# EAGLE board LinCorrector2.1 (EAGLE 7.4.0)
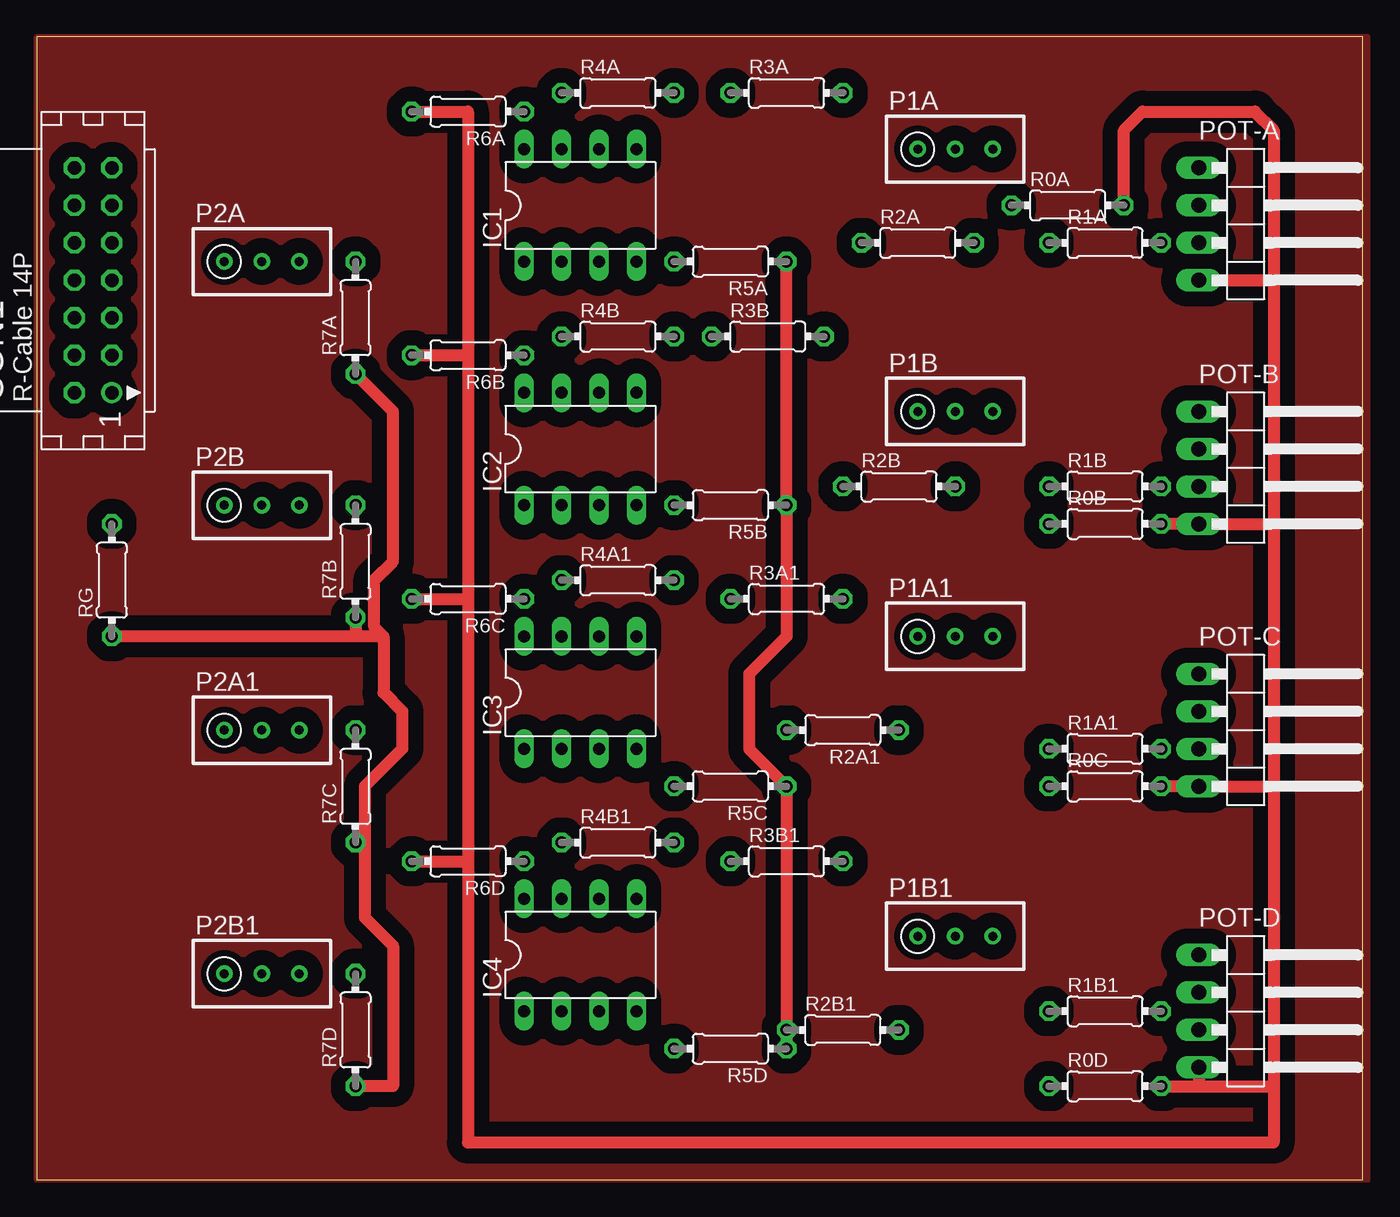
[diagram p0: board, top side]
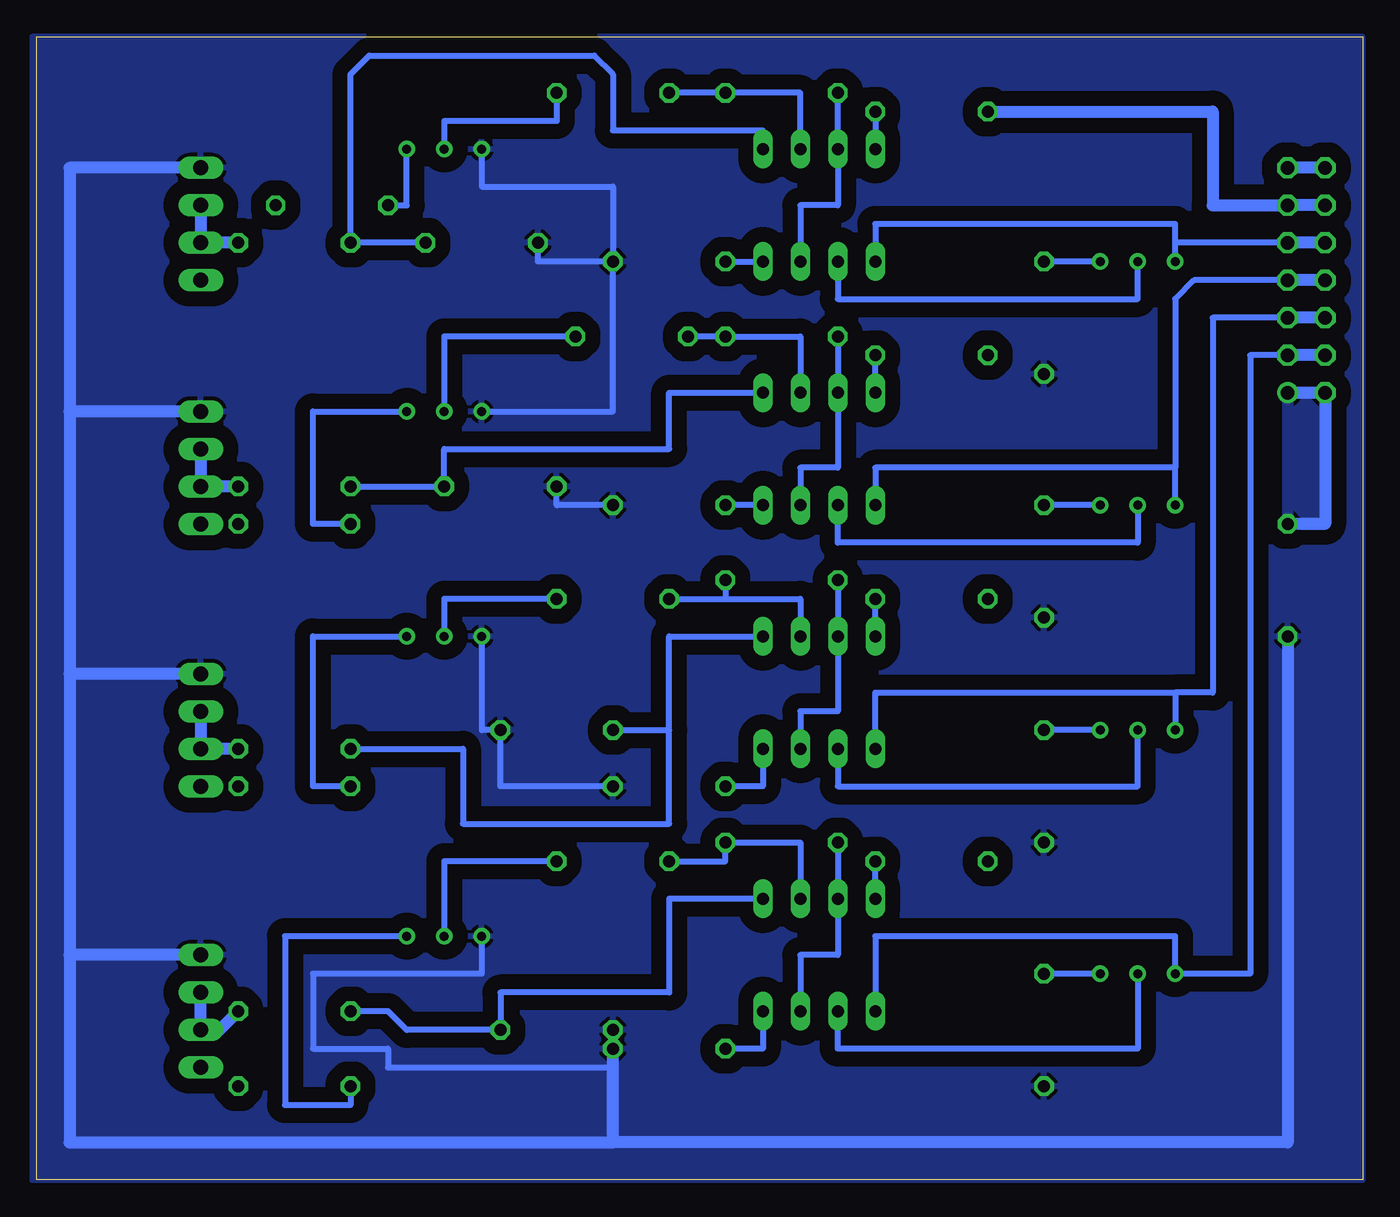
[diagram p1: board, bottom side, seen from below]

Size 89.84 x 77.46 mm. Coordinates in mm from the lower left corner, seen from the top.
Outline: 0,0 89.84,0 89.84,77.46 0,77.46 0,0
Copper layers (1*16): Top 0.035mm / dielectric 1.5mm / Bottom 0.035mm
Design rules "default *": minimum track width 10mil, minimum drill 24mil, track to track 40mil, track to pad 40mil, pad to pad 40mil, via to via 40mil, smd to smd 8mil, copper to edge 0mil, drill to drill 10mil, minimum pad ring 10mil, minimum via ring 8mil, stop-mask expansion 0mil, vias tented up to drill 0mil, thermal gap 10mil
Net classes: 0 default: width 0.381 mm, drill 0.508 mm, clearance 0.381 mm

## Footprints (pad centres in the part's own frame; a part is rotated, then mirrored left to right if it is on the bottom)
CON14 = drill 0.914: 1 -7.62,-1.27 | drill 0.914 octagon: 2 -7.62,1.27; 3 -5.08,-1.27; 4 -5.08,1.27; 5 -2.54,-1.27; 6 -2.54,1.27; 7 0,-1.27; 8 0,1.27; 9 2.54,-1.27; 10 2.54,1.27; 11 5.08,-1.27; 12 5.08,1.27; 13 7.62,-1.27; 14 7.62,1.27
DIP-8 = drill 0.813 long: 1 -3.81,-3.81; 2 -1.27,-3.81; 3 1.27,-3.81; 4 3.81,-3.81; 5 3.81,3.81; 6 1.27,3.81; 7 -1.27,3.81; 8 -3.81,3.81
RTRIM3296W = drill 0.61: 1 0,-2.54; 2 0,0; 3 0,2.54
1X04/90 = drill 1.016 long: 1 -3.81,-3.81; 2 -1.27,-3.81; 3 1.27,-3.81; 4 3.81,-3.81
0204/7 = drill 0.813 octagon: 1 -3.81,0; 2 3.81,0

## Placement (x,y rotation side)
CON1  [CON14]  3.81,60.96 90 top
IC1  MCP6002DIP  [DIP-8]  36.83,66.04 0 top
IC2  MCP6002DIP  [DIP-8]  36.83,49.53 0 top
IC3  MCP6002DIP  [DIP-8]  36.83,33.02 0 top
IC4  MCP6002DIP  [DIP-8]  36.83,15.24 0 top
P1A  500k  [RTRIM3296W]  62.23,69.85 270 top
P1A1  500k  [RTRIM3296W]  62.23,36.83 270 top
P1B  500k  [RTRIM3296W]  62.23,52.07 270 top
P1B1  500k  [RTRIM3296W]  62.23,16.51 270 top
P2A  500k  [RTRIM3296W]  15.24,62.23 270 top
P2A1  500k  [RTRIM3296W]  15.24,30.48 270 top
P2B  500k  [RTRIM3296W]  15.24,45.72 270 top
P2B1  500k  [RTRIM3296W]  15.24,13.97 270 top
POT-A  [1X04/90]  82.55,64.77 270 top
POT-B  [1X04/90]  82.55,48.26 270 top
POT-C  [1X04/90]  82.55,30.48 270 top
POT-D  [1X04/90]  82.55,11.43 270 top
R0A  0  [0204/7]  69.85,66.04 0 top
R0B  0  [0204/7]  72.39,44.45 0 top
R0C  0  [0204/7]  72.39,26.67 0 top
R0D  0  [0204/7]  72.39,6.35 0 top
R1A  10k  [0204/7]  72.39,63.5 0 top
R1A1  10k  [0204/7]  72.39,29.21 0 top
R1B  10k  [0204/7]  72.39,46.99 0 top
R1B1  10k  [0204/7]  72.39,11.43 0 top
R2A  10k  [0204/7]  59.69,63.5 0 top
R2A1  10k  [0204/7]  54.61,30.48 180 top
R2B  10k  [0204/7]  58.42,46.99 0 top
R2B1  10k  [0204/7]  54.61,10.16 0 top
R3A  10k  [0204/7]  50.8,73.66 0 top
R3A1  10k  [0204/7]  50.8,39.37 0 top
R3B  10k  [0204/7]  49.53,57.15 0 top
R3B1  10k  [0204/7]  50.8,21.59 0 top
R4A  10k  [0204/7]  39.37,73.66 0 top
R4A1  10k  [0204/7]  39.37,40.64 0 top
R4B  10k  [0204/7]  39.37,57.15 0 top
R4B1  10k  [0204/7]  39.37,22.86 0 top
R5A  0  [0204/7]  46.99,62.23 180 top
R5B  0  [0204/7]  46.99,45.72 180 top
R5C  0  [0204/7]  46.99,26.67 180 top
R5D  0  [0204/7]  46.99,8.89 180 top
R6A  0  [0204/7]  29.21,72.39 180 top
R6B  0  [0204/7]  29.21,55.88 180 top
R6C  0  [0204/7]  29.21,39.37 180 top
R6D  0  [0204/7]  29.21,21.59 180 top
R7A  0  [0204/7]  21.59,58.42 90 top
R7B  0  [0204/7]  21.59,41.91 90 top
R7C  0  [0204/7]  21.59,26.67 90 top
R7D  0  [0204/7]  21.59,10.16 90 top
RG  0  [0204/7]  5.08,40.64 90 top

## Library data of the parts
CON1 = con-harting; OC_FARNELL: unknown; OC_NEWARK: unknown
IC1-IC4 = adam - ics
P1A P1A1 P1B P1B1 P2A P2A1 P2B P2B1 R0A R0B R0C R0D R5A R5B R5C R5D R6A R6B R6C R6D R7A R7B R7C R7D RG = resistor
POT-A POT-B POT-C POT-D = pinhead
R1A R1A1 R1B R1B1 R2A R2A1 R2B R2B1 R3A R3A1 R3B R3B1 R4A R4A1 R4B R4B1 = rcl

## Nets
GND: P1A1.1 P1A.1 P1B1.1 P1B.1 POT-A.1 POT-B.1 POT-C.1 POT-D.1 R2A1.1 R2A.1 R2B1.1 R2B.1 R5A.1 R5B.1 R5C.1 R5D.1 R7A.1 R7B.1 R7C.1 R7D.1 RG.1
N$1: IC1.5 R1A.1 R2A.2
N$2: POT-A.2 POT-A.3 R1A.2
N$3: P1A.2 R3A.2
N$4: IC1.6 R3A.1 R4A.2
N$5: IC1.3 IC1.7 R4A.1
N$6: IC2.5 R1B.1 R2B.2
N$7: IC1.2 P2A.2
N$8: CON1.9 CON1.10 IC1.1 P2A.1
N$9: P1B.2 R3B.2
N$10: IC2.6 R3B.1 R4B.2
N$11: IC2.3 IC2.7 R4B.1
N$12: IC2.2 P2B.2
N$13: CON1.7 CON1.8 IC2.1 P2B.1
N$14: POT-B.2 POT-B.3 R1B.2
N$15: IC3.5 R1A1.1 R2A1.2
N$16: P1A1.2 R3A1.2
N$17: IC3.6 R3A1.1 R4A1.2
N$18: IC3.3 IC3.7 R4A1.1
N$19: IC3.2 P2A1.2
N$20: CON1.5 CON1.6 IC3.1 P2A1.1
N$21: POT-C.2 POT-C.3 R1A1.2
N$22: IC4.5 R1B1.1 R2B1.2
N$23: P1B1.2 R3B1.2
N$24: IC4.6 R3B1.1 R4B1.2
N$25: IC4.3 IC4.7 R4B1.1
N$26: IC4.2 P2B1.2
N$27: P1A.3 R0A.1
N$28: POT-D.2 POT-D.3 R1B1.2
N$29: CON1.3 CON1.4 IC4.1 P2B1.1
N$30: P1B.3 R0B.1
N$31: P1A1.3 R0C.1
N$32: P1B1.3 R0D.1
N$33: IC1.8 R6A.1
N$34: IC1.4 R5A.2
N$35: IC2.8 R6B.1
N$36: IC3.8 R6C.1
N$37: IC4.8 R6D.1
N$38: IC2.4 R5B.2
N$39: IC3.4 R5C.2
N$40: IC4.4 R5D.2
N$42: P2A.3 R7A.2
N$43: P2B.3 R7B.2
N$44: P2A1.3 R7C.2
N$45: P2B1.3 R7D.2
N$46: CON1.1 CON1.2 RG.2
N$47: CON1.13 CON1.14
VCC: CON1.11 CON1.12 POT-A.4 POT-B.4 POT-C.4 POT-D.4 R0A.2 R0B.2 R0C.2 R0D.2 R6A.2 R6B.2 R6C.2 R6D.2

## Tracks (layer width: path | path; a pad name or v marks a point on that pad's centre or on a via)
GND
  Top 0.813: R5A.1 R5B.1 50.8,36.83 48.26,34.29 48.26,29.21 R5C.1 R5D.1 | 23.5,36.83 21.59,36.83 | 21.59,36.83 RG.1 | 23.5,36.83 23.5,33.02 24.77,31.75 24.77,29.21 22.23,26.67 22.23,22.86 | R7C.1 22.23,22.86 | 22.23,22.86 22.23,17.78 24.13,15.88 24.13,6.35 R7D.1 | 23.5,36.83 22.86,37.47 22.86,40.64 24.13,41.91 24.13,52.07 R7A.1 | R7B.1 21.59,36.83
  Bottom 0.406: P1A.1 59.69,67.31 50.8,67.31 R5A.1 | R5A.1 55.88,62.23 R2A.1 | P1B.1 50.8,52.07 R5A.1 | R5B.1 54.61,45.72 R2B.1 | P1A1.1 59.69,30.48 R2A1.1 58.42,26.67 R5C.1 | R2B1.1 R5D.1 | P1B1.1 59.69,13.97 71.12,13.97 71.12,8.89 66.04,8.89 66.04,7.62 50.8,7.62
  Bottom 0.813: 50.8,2.54 5.08,2.54 RG.1 | 50.8,2.54 50.8,7.62 R5D.1 | POT-A.1 87.63,68.58 87.63,52.07 | 87.63,52.07 87.63,34.29 | 87.63,34.29 87.63,15.24 | 87.63,15.24 87.63,2.54 50.8,2.54 | POT-D.1 87.63,15.24 | POT-C.1 87.63,34.29 | POT-B.1 87.63,52.07
  pour Bottom: 0,77.47 90.17,77.47 90.17,0 0,0
N$1
  Bottom 0.406: R2A.2 R1A.1 68.58,74.93 67.31,76.2 52.07,76.2 50.8,74.93 50.8,71.12 40.64,71.12 IC1.5
N$2
  Bottom 0.813: POT-A.2 POT-A.3 R1A.2
N$3
  Bottom 0.406: R3A.2 54.61,71.75 62.23,71.75 P1A.2
N$4
  Bottom 0.406: R3A.1 R4A.2 38.1,73.66 IC1.6
N$5
  Bottom 0.406: R4A.1 IC1.7 35.56,66.04 38.1,66.04 IC1.3
N$6
  Bottom 0.406: R1B.1 R2B.2 62.23,49.53 46.99,49.53 46.99,53.34 IC2.5
N$7
  Bottom 0.406: IC1.2 35.56,59.69 15.24,59.69 P2A.2
N$8
  Bottom 0.406: P2A.1 12.7,63.5 | 12.7,63.5 12.7,64.77 33.02,64.77 IC1.1 | CON1.9 12.7,63.5
  Bottom 0.813: CON1.10 CON1.9
N$9
  Bottom 0.406: R3B.2 62.23,57.15 P1B.2
N$10
  Bottom 0.406: IC2.6 38.1,57.15 R4B.2 R3B.1
N$11
  Bottom 0.406: R4B.1 IC2.7 35.56,48.26 38.1,48.26 IC2.3
N$12
  Bottom 0.406: P2B.2 15.24,43.18 35.56,43.18 IC2.2
N$13
  Bottom 0.406: P2B.1 12.7,48.26 | 12.7,48.26 33.02,48.26 IC2.1 | CON1.7 11.43,60.96 12.7,59.69 12.7,48.26
  Bottom 0.813: CON1.8 CON1.7
N$14
  Bottom 0.813: POT-B.2 POT-B.3 R1B.2
N$15
  Bottom 0.406: R2A1.2 46.99,30.48 | 46.99,30.48 46.99,36.83 IC3.5 | R1A1.1 60.96,29.21 60.96,24.13 46.99,24.13 46.99,30.48
N$16
  Bottom 0.406: R3A1.2 62.23,39.37 P1A1.2
N$17
  Bottom 0.406: IC3.6 38.1,39.37 43.18,39.37 | R3A1.1 43.18,39.37 | R4A1.2 43.18,39.37
N$18
  Bottom 0.406: R4A1.1 IC3.7 35.56,31.75 38.1,31.75 IC3.3
N$19
  Bottom 0.406: IC3.2 35.56,26.67 15.24,26.67 P2A1.2
N$20
  Bottom 0.406: 12.7,33.02 10.16,33.02 10.16,58.42 CON1.6 | 12.7,33.02 P2A1.1 | IC3.1 33.02,33.02 12.7,33.02
  Bottom 0.813: CON1.6 CON1.5
N$21
  Bottom 0.813: POT-C.2 POT-C.3 R1A1.2
N$22
  Bottom 0.406: IC4.5 46.99,19.05 46.99,12.7 58.42,12.7 R2B1.2 64.77,10.16 66.04,11.43 R1B1.1
N$23
  Bottom 0.406: R3B1.2 62.23,21.59 P1B1.2
N$24
  Bottom 0.406: IC4.6 38.1,22.86 R4B1.2 43.18,21.59 R3B1.1
N$25
  Bottom 0.406: R4B1.1 IC4.7 35.56,15.24 38.1,15.24 IC4.3
N$26
  Bottom 0.406: P2B1.2 15.24,8.89 35.56,8.89 IC4.2
N$27
  Bottom 0.406: R0A.1 64.77,66.04 P1A.3
N$28
  Bottom 0.813: R1B1.2 77.47,10.16 POT-D.3 POT-D.2
N$29
  Bottom 0.406: CON1.3 7.62,55.88 7.62,13.97 P2B1.1 12.7,16.51 33.02,16.51 IC4.1
  Bottom 0.813: CON1.4 CON1.3
N$30
  Bottom 0.406: R0B.1 71.12,44.45 71.12,52.07 P1B.3
N$31
  Bottom 0.406: R0C.1 71.12,26.67 71.12,36.83 P1A1.3
N$32
  Bottom 0.406: R0D.1 68.58,5.08 73.03,5.08 73.03,16.51 P1B1.3
N$33
  Bottom 0.406: R6A.1 IC1.8
N$34
  Bottom 0.406: R5A.2 IC1.4
N$35
  Bottom 0.406: IC2.8 R6B.1
N$36
  Bottom 0.406: IC3.8 R6C.1
N$37
  Bottom 0.406: IC4.8 R6D.1
N$38
  Bottom 0.406: IC2.4 R5B.2
N$39
  Bottom 0.406: IC3.4 40.64,26.67 R5C.2
N$40
  Bottom 0.406: IC4.4 40.64,8.89 R5D.2
N$42
  Bottom 0.406: P2A.3 R7A.2
N$43
  Bottom 0.406: P2B.3 R7B.2
N$44
  Bottom 0.406: P2A1.3 R7C.2
N$45
  Bottom 0.406: P2B1.3 R7D.2
N$46
  Bottom 0.813: CON1.1 CON1.2 2.54,44.45 RG.2
  pour Bottom: 2.54,53.34 5.08,53.34 5.08,44.45 2.54,44.45
N$47
  Bottom 0.813: CON1.14 CON1.13
N$48
  pour Top: 0,77.47 90.17,77.47 90.17,0 0,0
VCC
  Top 0.813: R0A.2 73.66,71.12 74.93,72.39 82.55,72.39 83.82,71.12 83.82,60.96 | 83.82,60.96 83.82,44.45 | 83.82,44.45 83.82,26.67 | R0C.2 POT-C.4 83.82,26.67 | R0B.2 POT-B.4 83.82,44.45 | POT-A.4 83.82,60.96 | R0D.2 78.74,6.35 | 78.74,6.35 83.82,6.35 | 83.82,6.35 83.82,2.54 29.21,2.54 29.21,21.59 | 83.82,26.67 83.82,6.35 | R6A.2 29.21,72.39 29.21,55.88 | 29.21,55.88 29.21,39.37 | 29.21,39.37 29.21,21.59 | R6B.2 29.21,55.88 | R6C.2 29.21,39.37 | R6D.2 29.21,21.59 | POT-D.4 78.74,6.35
  Bottom 0.813: R6A.2 10.16,72.39 10.16,66.04 CON1.11 CON1.12